# Altium PCB BUCK CONVERTER FOOTPRİNT.PcbDoc
Units mm, origin at the board's own origin, x right, y up, seen from the top; angles counter-clockwise.
Board outline 43.95 x 30.2 mm, 2 copper layers (Top Layer, Bottom Layer); 7 components, 5 nets, 22 pads, 45 vias.
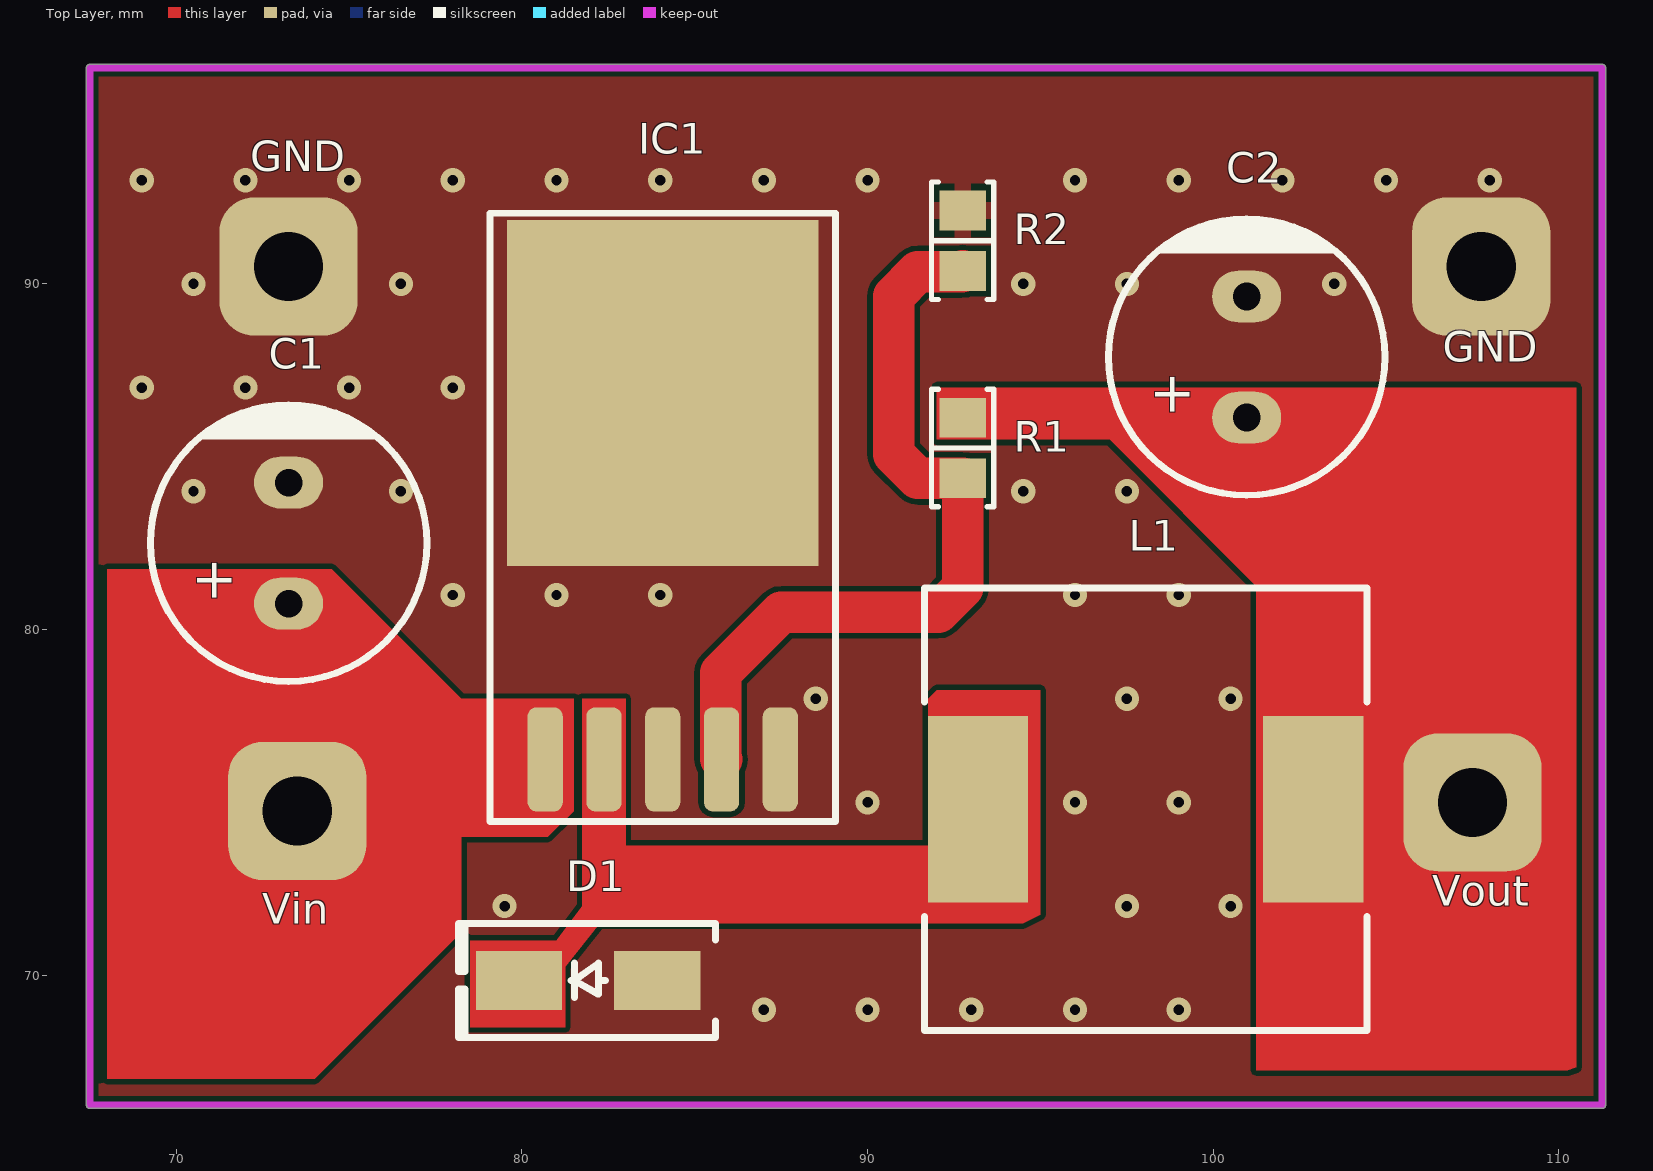
[diagram p0: Top Layer view]
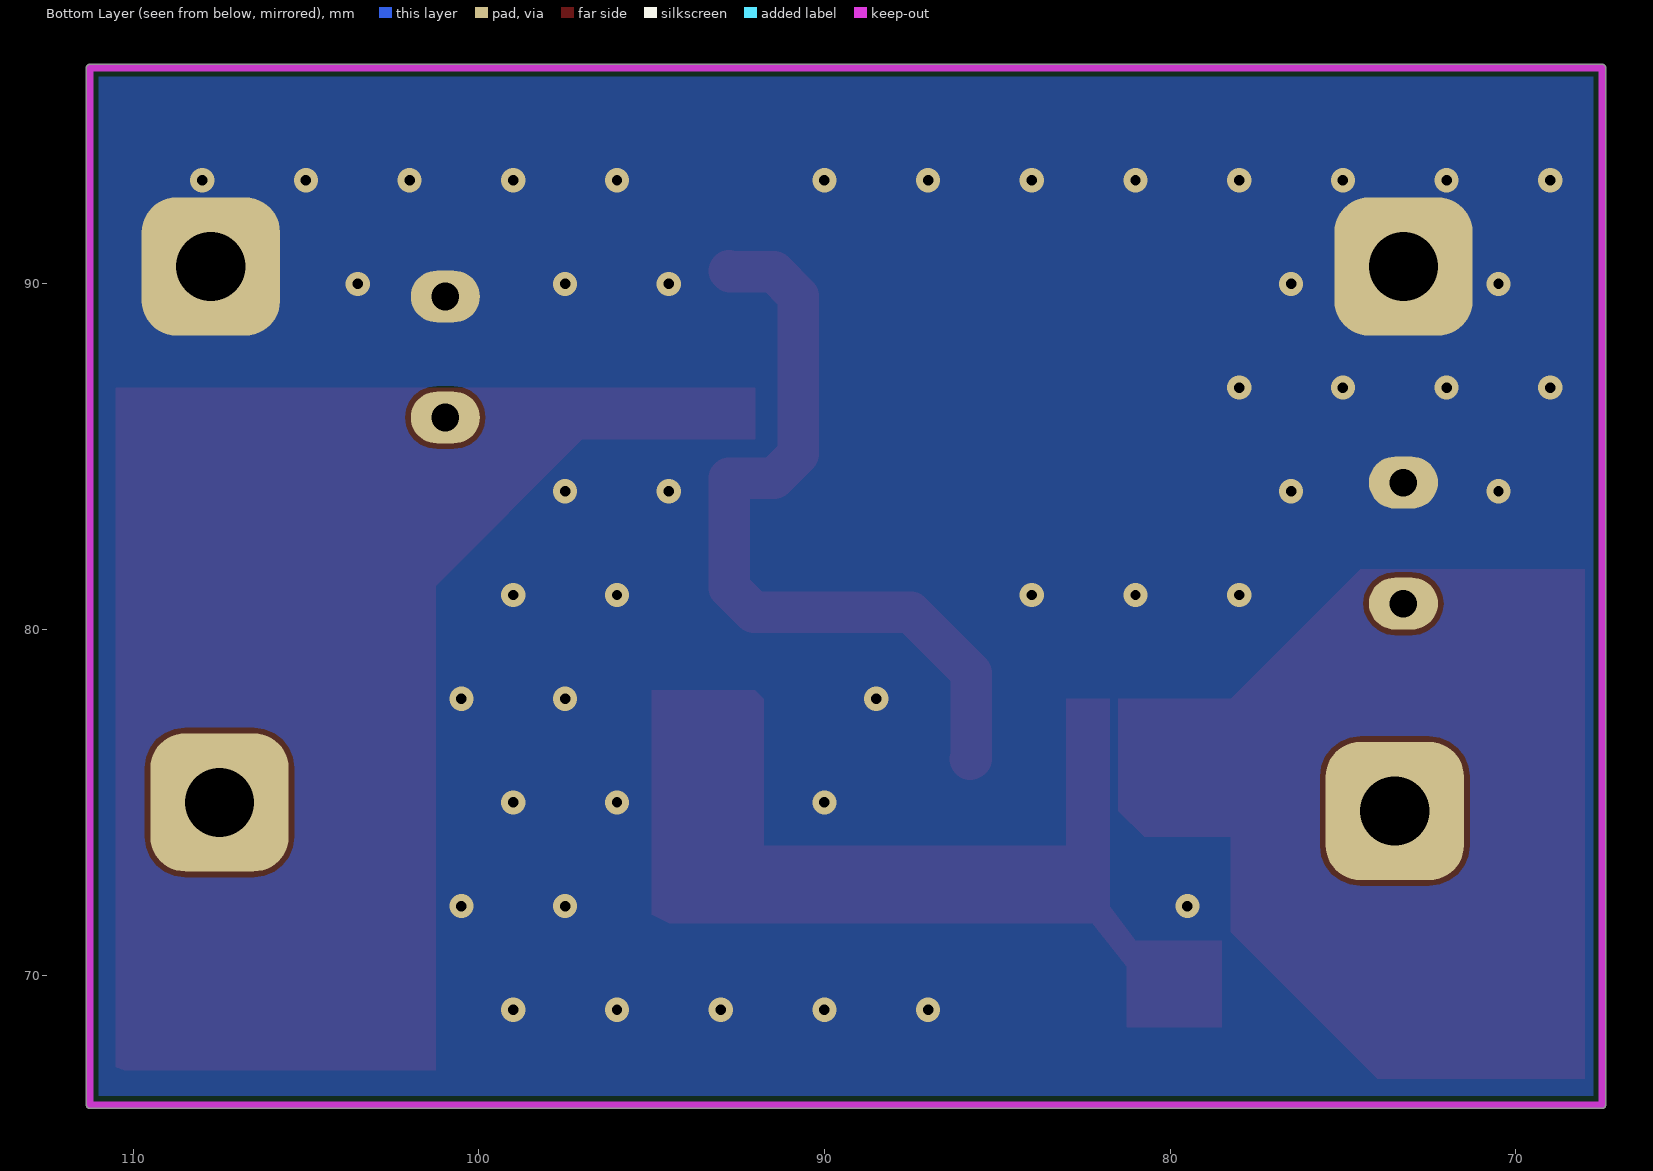
[diagram p1: Bottom Layer view, seen from below]
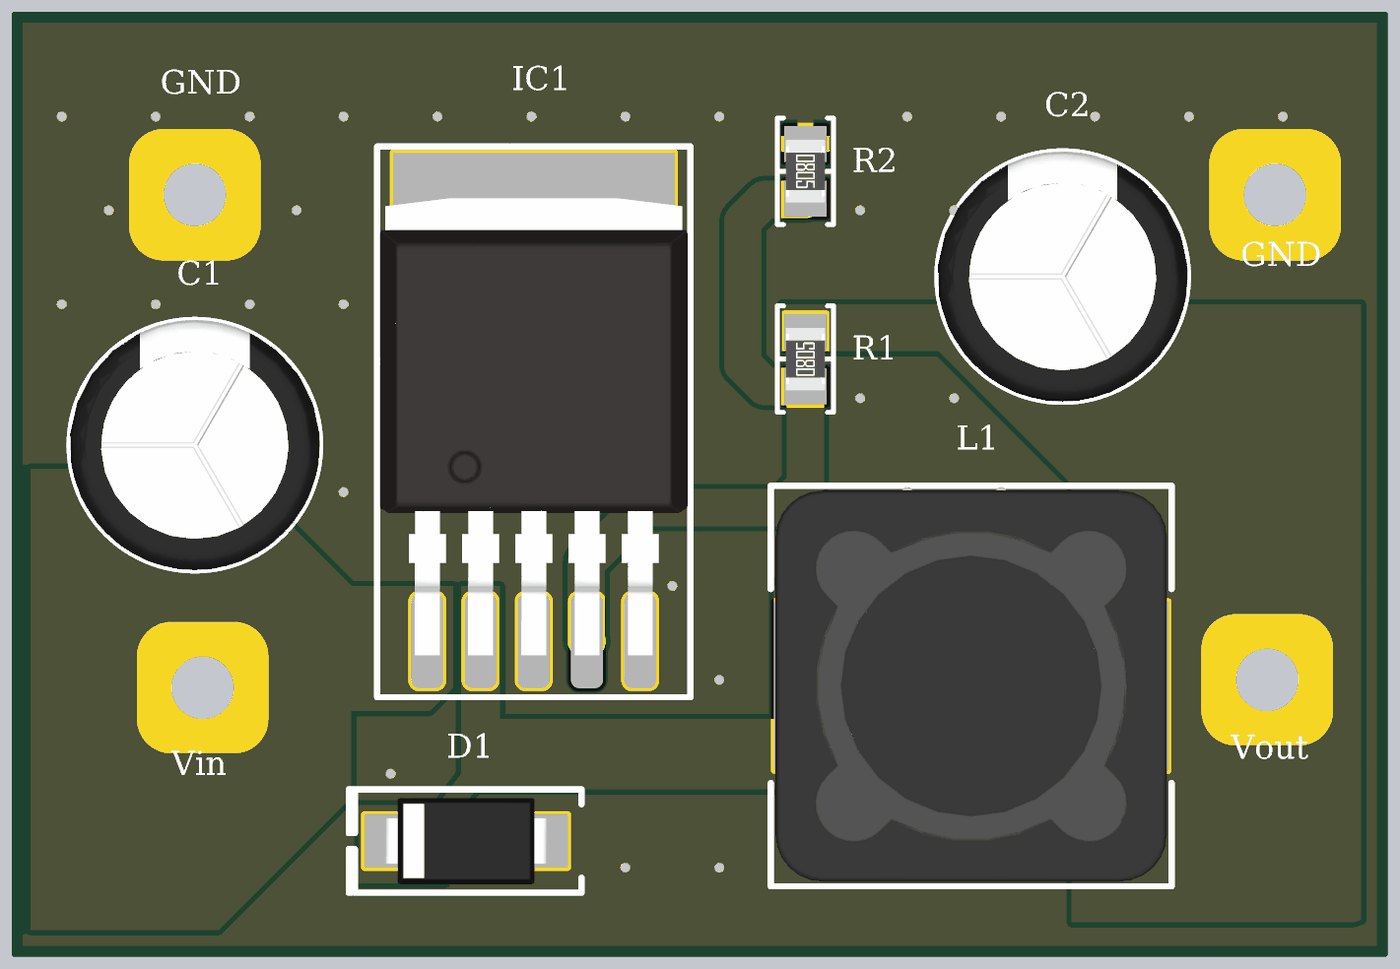
[diagram p2: 3D render of the assembled board from above, using the file's embedded part models]

## Layer stack, top to bottom
Top Solder: solder mask 0.0102, Solder Resist, Dk 3.5
Top Layer: signal copper 0.0356
Dielectric 1: dielectric 0.32, FR-4, Dk 4.8
Bottom Layer: signal copper 0.0356
Bottom Solder: solder mask 0.0102, Solder Resist, Dk 3.5

## Board outline
67.4,66.25 ccw(c67.5,66.25) 67.5,66.15 111.25,66.15 ccw(c111.25,66.25) 111.35,66.25 111.35,96.25 ccw(c111.25,96.25) 111.25,96.35 67.5,96.35 ccw(c67.5,96.25) 67.4,96.25

## Design rules (kind name [scope] priority, off if disabled: settings)
Clearance [All] p1: gap=0.152 ignorepadtopadclearanceinfootprint=FALSE
HoleSize [All] p1: absolutevalues=TRUE maxlimit=5 minlimit=0.025 maxpercent=80.000 minpercent=20.000
PolygonConnect [All] p1: thpad.connectstyle=Direct thpad.reliefconductorwidth=0.254 thpad.reliefentries=4 thpad.polygonreliefangle="90 Angle" thpad.airgapwidth=0.254 smdpad.connectstyle=Relief smdpad.reliefconductorwidth=0.5 smdpad.reliefentries=4 smdpad.polygonreliefangle="90 Angle" smdpad.airgapwidth=0.2 via.connectstyle=Direct via.reliefconductorwidth=0.254 via.reliefentries=4 via.polygonreliefangle="90 Angle" via.airgapwidth=0.254
RoutingVias [All] p1: holewidth=0.711 width=1.27 viastyle="Through Hole" minholewidth=0.711 minwidth=1.27 maxholewidth=0.711 maxwidth=1.27
SolderMaskExpansion [All] p1: expansion=0.102 istentingtop=FALSE
Width [All] p1: maxlimit=2 minlimit=0.152 preferedwidth=0.5
29 further rules are at their usual default settings.

## Components (designator, comment, footprint, x,y, rotation, side; value= is the part's Value field where it differs from the comment)
C1 "100 µF" "CAP AL TH D8 L3.5 H12.5" 73.25,82.5 r90 top
C2 "220 µF" "CAP AL TH D8 L3.5 H12.5" 100.965,87.884 r90 top
D1 "ACDBA560-HF" "DO214AC SMA" 81.915,69.85 r180 top
IC1 "LM2595" "LM2596 FOOTPRİNT" 84.074,85.344 r0 top
L1 "33 µH" "BOURNS SRR1280" 98.044,74.803 r0 top
R1 "10 kOhms" "RES 0805_2012" 92.75,85.25 r90 top
R2 "4.7 kOhms" "RES 0805_2012" 92.75,91.25 r270 top

## Footprints (in the part's own frame and the unit in brackets; to place one, negate y for a bottom-side part, rotate by r counter-clockwise, add the part's x,y. Pads: shape width x height; smd on the part's side, far side on the other; paste and mask are expansions set on the pad)
"BOURNS SRR1280" [mm] "Precision Wire Wound Inductor, 2-Leads, Body 12.50x12.50mm, IPC Medium Density"
  rect 2.9x5.4 smd: 1(-4.85,0) 2(4.85,0)
  silkscreen extent -6.4,-6.4 6.4,6.4, body extent -6.25,-6.25 6.25,6.25, height 7.9
"CAP AL TH D8 L3.5 H12.5" [mm] "8MM Diameter, 3.5MM Lead Spacing Aluminium Capacitor"
  oval 1.5x2 hole 0.8: 1(-1.75,0) 2(1.75,0)
  silkscreen extent -4,-4 4,4, body extent -4,-4 4,4, height 11.5
"DO214AC SMA" [mm] "Molded Diode, 2-Leads, Body 4.30x2.60mm, IPC Medium Density"
  rect 2.5x1.7 smd: 1(-2,0) 2(2,0)
  silkscreen extent -3.68,-1.65 3.75,1.65, body extent -2.6,-1.37 2.6,1.37, height 2.4
"LM2596 FOOTPRİNT" [mm]
  rrect50% 1.016x3.015 smd: 1(-3.4,-9.1) 2(-1.7,-9.1) 3(0,-9.1) 4(1.7,-9.1) 5(3.4,-9.1)
  rect 9x10 smd: 3(0,1.5)
  silkscreen extent -5,-10.9 5,6.7, body extent -4.91,-9.56 4.91,5.04, height 4.22
"RES 0805_2012" [mm] "Chip Resistor, 2-Leads, Body 2.00x1.25mm, IPC Medium Density"
  rect 1.15x1.35 smd: 1(-0.875,0) 2(0.875,0)
  silkscreen extent -1.7,-0.9 1.7,0.9, body extent -1,-0.62 1,0.63, height 0.6

## Part data
C1: library part ECA-1JM101, "CAP ALUM 100UF 20% 63V RADIAL", Device Package="Radial, Can", Lifetime @ Temp.="2000 Hrs @ 85°C", manufacturer="Panasonic Electronic Components", Operating Temperature="-40°C ~ 85°C", Ripple Current @ High Frequency="459 mA @ 10 kHz", Ripple Current @ Low Frequency="270 mA @ 120 Hz", Supplier Part Number 1=P5193-ND, Tolerance=±20%, Voltage - Rated="63 V", Applications="General Purpose", Capacitance="100 µF", componentlink1description=Datasheet, componentlink1url=//media.digikey.com/pdf/Data%20Sheets/Panasonic%20Electronic%20Components/ECA-xxM%20Series,TypeA.pdf, componentlink2description="DigiKey Link", componentlink2url=https://www.digikey.com/en/products/detail/panasonic-electronic-components/ECA-1JM101/245052, Height - Seated (Max)="0.492\" (12.50mm)", lastupdated="14.8.2022 22:01:24", Lead Spacing="0.138\" (3.50mm)", Lifecycle Status=Active, Minimum Order=1, Mounting Type="Through Hole", Package / Case="Radial, Can", packaging=Bulk, Part Number=ECA-1JM101, Part Status=Active, partid=7225, Polarization=Polar, price=0.13, series=M-A, Size / Dimension="0.315\" Dia (8.00mm)", Supplier 1=DigiKey
C2: library part ECA-1VM221, "CAP ALUM 220UF 20% 35V RADIAL", Device Package="Radial, Can", Lifetime @ Temp.="2000 Hrs @ 85°C", manufacturer="Panasonic Electronic Components", Operating Temperature="-40°C ~ 85°C", Ripple Current @ High Frequency="595 mA @ 10 kHz", Ripple Current @ Low Frequency="350 mA @ 120 Hz", Supplier Part Number 1=P5166-ND, Tolerance=±20%, Voltage - Rated="35 V", Applications="General Purpose", Capacitance="220 µF", componentlink1description=Datasheet, componentlink1url=//media.digikey.com/pdf/Data%20Sheets/Panasonic%20Electronic%20Components/ECA-xxM%20Series,TypeA.pdf, componentlink2description="DigiKey Link", componentlink2url=https://www.digikey.com/en/products/detail/panasonic-electronic-components/ECA-1VM221/245025, Height - Seated (Max)="0.492\" (12.50mm)", lastupdated="14.8.2022 22:01:23", Lead Spacing="0.138\" (3.50mm)", Lifecycle Status=Active, Minimum Order=1, Mounting Type="Through Hole", Package / Case="Radial, Can", packaging=Bulk, Part Number=ECA-1VM221, Part Status=Active, partid=7280, Polarization=Polar, price=0.10, series=M-A, Size / Dimension="0.315\" Dia (8.00mm)", Supplier 1=DigiKey
D1: "DIODE SCHOTTKY 60V 5A DO214AC", Capacitance @ Vr, F="250pF @ 4V, 1MHz", Current - Average Rectified (Io)="5A (DC)", Current - Reverse Leakage @ Vr="500 µA @ 60 V", manufacturer="Comchip Technology", Operating Temperature - Junction="-55°C ~ 125°C", Package / Case="DO-214AC, SMA", Supplier Device Package="DO-214AC (SMA)", Supplier Part Number 1=641-2078-1-ND, Voltage - DC Reverse (Vr) (Max)="60 V", Voltage - Forward (Vf) (Max) @ If="700 mV @ 5 A", componentlink1description=Datasheet, componentlink1url=http://www.comchiptech.com/admin/files/product/ACDBA560-HF%20RevA201382.pdf, componentlink2description="DigiKey Link", componentlink2url=https://www.digikey.com/en/products/detail/comchip-technology/ACDBA560-HF/7100903, Diode Type=Schottky, lastupdated="14.8.2022 21:54:06", Lifecycle Status=Active, Minimum Order=1, Mounting Type="Surface Mount", packaging=TapeAndReel, Part Number=ACDBA560-HF, Part Status=Active, partid=1832, price=0.15, series="Automotive, AEC-Q101", Speed="Fast Recovery =< 500ns, > 200mA (Io)", Supplier 1=DigiKey
L1: library part SRR1280-330M, "FIXED IND 33UH 3.5A 57 MOHM SMD", Current - Saturation=3.3A, Current Rating (Amps)="3.5 A", DC Resistance (DCR)="57mOhm Max", Device Package=Nonstandard, Frequency - Self Resonant=9.5MHz, manufacturer="Bourns Inc.", Operating Temperature="-40°C ~ 125°C", Q @ Freq="28 @ 2.52MHz", Supplier Part Number 1=SRR1280-330MCT-ND, Tolerance=±20%, Inductance Frequency - Test="100 kHz", componentlink1description=Datasheet, componentlink1url=https://www.bourns.com/docs/Product-Datasheets/SRR1280.pdf, componentlink2description="DigiKey Link", componentlink2url=https://www.digikey.com/en/products/detail/bourns-inc/SRR1280-330M/1969998, Height - Seated (Max)="0.315\" (8.00mm)", lastupdated="14.8.2022 21:59:04", Lifecycle Status=Active, Material - Core=Ferrite, Minimum Order=1, Mounting Type="Surface Mount", Package / Case=Nonstandard, packaging=TapeAndReel, Part Number=SRR1280-330M, Part Status=Active, partid=25, price=0.55, series=SRR1280, Shielding=Shielded, Size / Dimension="0.492\" L x 0.492\" W (12.50mm x 12.50mm)", Supplier 1=DigiKey, Type="Drum Core, Wirewound", Inductance="33 µH"
R1: library part CRGP0805F10K, "RES 10K OHM 1% 1/3W 0805", Device Package="0805 (2012 Metric)", manufacturer="TE Connectivity Passive Product", Operating Temperature="-55°C ~ 155°C", Power (Watts)="0.333W, 1/3W", Supplier Device Package=0805, Supplier Part Number 1=A130489CT-ND, Temperature Coefficient=±100ppm/°C, Tolerance=±1%, componentlink1description=Datasheet, componentlink1url=https://www.te.com/commerce/DocumentDelivery/DDEController?Action=srchrtrv&DocNm=9-1773463-9&DocType=DS&DocLang=English, componentlink2description="DigiKey Link", componentlink2url=https://www.digikey.com/en/products/detail/te-connectivity-passive-product/CRGP0805F10K/8577091, Composition="Thick Film", Features="Pulse Withstanding", Height - Seated (Max)="0.026\" (0.65mm)", lastupdated="14.8.2022 21:44:19", Lifecycle Status=Active, Minimum Order=1, Number of Terminations=2, Package / Case="0805 (2012 Metric)", packaging=TapeAndReel, Part Number=CRGP0805F10K, Part Status=Active, partid=41700, price=0.03, Resistance="10 kOhms", series=CRGP, Size / Dimension="0.079\" L x 0.049\" W (2.00mm x 1.25mm)", Supplier 1=DigiKey
R2: library part CRGP0805F4K7, "RES 4.7K OHM 1% 1/3W 0805", Device Package="0805 (2012 Metric)", manufacturer="TE Connectivity Passive Product", Operating Temperature="-55°C ~ 155°C", Power (Watts)="0.333W, 1/3W", Supplier Device Package=0805, Supplier Part Number 1=A130485CT-ND, Temperature Coefficient=±100ppm/°C, Tolerance=±1%, componentlink1description=Datasheet, componentlink1url=https://www.te.com/commerce/DocumentDelivery/DDEController?Action=srchrtrv&DocNm=9-1773463-9&DocType=DS&DocLang=English, componentlink2description="DigiKey Link", componentlink2url=https://www.digikey.com/en/products/detail/te-connectivity-passive-product/CRGP0805F4K7/8577087, Composition="Thick Film", Features="Pulse Withstanding", Height - Seated (Max)="0.026\" (0.65mm)", lastupdated="14.8.2022 21:45:06", Lifecycle Status=Active, Minimum Order=1, Number of Terminations=2, Package / Case="0805 (2012 Metric)", packaging=TapeAndReel, Part Number=CRGP0805F4K7, Part Status=Active, partid=28726, price=0.03, Resistance="4.7 kOhms", series=CRGP, Size / Dimension="0.079\" L x 0.049\" W (2.00mm x 1.25mm)", Supplier 1=DigiKey

## Free pads (board coordinates)
  rrect50% 4x4 hole 2: GND(73.25,90.5) GND1(107.75,90.5) Vin(73.5,74.75) Vout(107.5,75)

## Via types
v1: diameter 0.7, hole 0.3, Top Layer to Bottom Layer, tented both sides, 45 vias

## Nets (pads, with @x,y where several pads share a name; then routed paths per layer and width w, separated by ;. In a path a pad name is that pad's centre, name@x,y a point inside that pad or via, vN(x,y) a via of type N, cw(c..) or ccw(c..) an arc to the next point about the centre after c; other vN are vias at no path point)
+12: C2.1 L1.2 pad.Vout R1.2
FEEDBACK: IC1.4 R1.1 R2.2 | length 22.9
  Top Layer w1.2: IC1.4 85.75,76.268 85.75,78.75 87.5,80.5 92.047,80.5 92.75,81.203 R1.1 91.453,84.375 90.75,85.078 90.75,89.647 91.453,90.35 92.725,90.35 R2.2
GND: C1.2 C2.2 D1.1 IC1.3 IC1.5 pad.GND pad.GND1 R2.1
  other v1: 87,69 90,69 93,69 96,69 99,69 79.5,72 97.5,72 100.5,72 90,75 96,75 99,75 88.5,78 97.5,78 100.5,78 78,81 81,81 84,81 96,81 99,81 70.5,84 76.5,84 94.5,84 97.5,84 69,87 72,87 75,87 78,87 70.5,90 76.5,90 94.5,90 97.5,90 103.5,90 69,93 72,93 75,93 78,93 81,93 84,93 87,93 90,93 96,93 99,93 102,93 105,93 108,93
NetD1_2: D1.2 IC1.2 L1.1
VCC: C1.1 IC1.1 pad.Vin

## Polygon pours and split planes (outlines as drawn)
GND on Bottom Layer "GND_L02_P000" (solid, pour order 0): 67.5,96.25 111.25,96.25 111.25,66.25 67.5,66.25
GND on Top Layer "GND_L01_P006" (solid, pour order 6): 67.5,96.25 111.25,96.25 111.25,66.25 67.5,66.25

## Keep-outs
Keep-Out Layer:
  lines w0.2: 67.5,66.25 67.5,96.25 111.25,96.25 111.25,66.25 67.5,66.25

## Other copper
Top Layer:
  region net VCC: 68,67 68,81.75 74.5,81.75 78.25,78 81.5,78 81.5,74.75 80.75,74 78.25,74 78.25,71.25 74,67
  region net +12: 92,87 110.5,87 110.5,67.333 110.25,67.25 109.25,67.25 101.25,67.25 101.25,81.25 97,85.5 92,85.5
  region net NetD1_2: 81.75,78 83,78 83,73.75 91.75,73.75 91.75,78 92,78.25 95,78.25 95,71.75 94.5,71.5 94.25,71.5 82.25,71.5 81.25,70.25 81.25,68.5 78.5,68.5 78.5,69 78.5,69.25 78.5,71 81,71 81.75,72

## Silkscreen, mask and mechanical layers (free items; w line width, h text height)
Top Overlay:
  text "GND" at 72.144,92.964 h1.5
  text "GND" at 106.644,87.464 h1.5
  text "Vout" at 106.33,71.72 h1.5
  text "Vin" at 72.494,71.204 h1.5

## Text inside footprints (layer, text, board x,y; h text height)
C1: Top Overlay "+" at 72,80.75 h2 r90
C2: Top Overlay "+" at 99.715,86.134 h2 r90